# EAGLE board uflasherx (EAGLE 7.6.0)
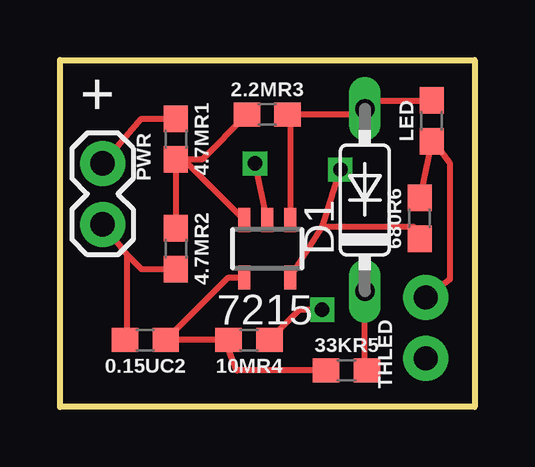
[diagram p0: board, top side]
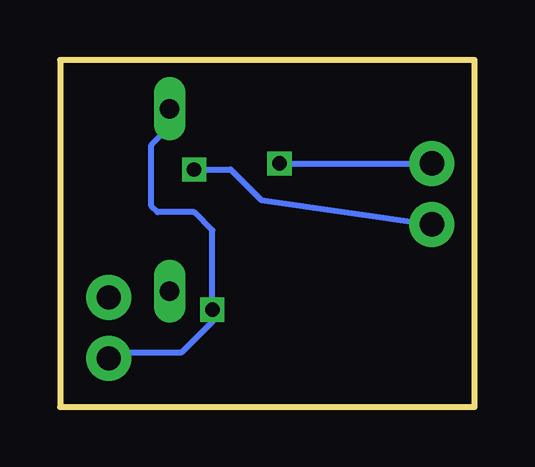
[diagram p1: board, bottom side, seen from below]

Size 17.27 x 14.48 mm. Coordinates in mm from the lower left corner, seen from the top.
Outline: 0,14.48 17.27,14.48 17.27,0 0,0 0,14.48
Copper layers (1*16): Top 0.035mm / dielectric 1.5mm / Bottom 0.035mm
Design rules "default": minimum track width 10mil, minimum drill 24mil, track to track 8mil, track to pad 8mil, pad to pad 8mil, via to via 8mil, smd to smd 8mil, copper to edge 40mil, drill to drill 8mil, minimum pad ring 10mil, minimum via ring 8mil, stop-mask expansion 4mil, vias tented up to drill 0mil, thermal gap 10mil

## Footprints (pad centres in the part's own frame; a part is rotated, then mirrored left to right if it is on the bottom)
0603 = smd 1.1 x 1: 1 -0.85,0; 2 0.85,0
SOT23-5 = smd 0.5 x 1: 1 -0.95,-1.2; 2 0,-1.2; 3 0.95,-1.2; 4 0.95,1.2; 5 -0.95,1.2
DO35-7 = drill 0.813 long: A 3.81,0; C -3.81,0
1X02 = drill 1.016 pad 1.88: 1 0,0; 2 2.54,0
1X02_NO_SILK = drill 1.016 pad 1.88: 1 0,0; 2 2.54,0

## Placement (x,y rotation side)
0.15UC2  [0603]  3.56,2.79 180 top
2.2MR3  [0603]  8.64,12.19 0 top
4.7MR1  [0603]  4.83,11.18 270 top
4.7MR2  [0603]  4.83,6.6 270 top
10MR4  [0603]  7.87,2.79 180 top
33KR5  [0603]  11.94,1.52 0 top
680R6  [0603]  14.99,7.87 90 top
7215  [SOT23-5]  8.64,6.6 180 top
D1  [DO35-7]  12.7,8.64 90 top
LED  [0603]  15.49,11.94 90 top
PWR  [1X02]  1.78,10.16 270 top
THLED  [1X02_NO_SILK]  15.24,2.03 90 top

## Library data of the parts
0.15UC2 = SparkFun-Capacitors
2.2MR3 4.7MR1 4.7MR2 10MR4 33KR5 680R6 LED = SparkFun-Resistors
7215 = zetex
D1 = diode
PWR THLED = SparkFun-Connectors

## Nets
3V: 4.7MR1.1 7215.2 PWR.1
DBOT: 33KR5.2 D1.C
FOUR: 0.15UC2.1 10MR4.2 33KR5.1 7215.4
GND: 0.15UC2.2 4.7MR2.2 680R6.1 7215.5 PWR.2
LEDBOT: 680R6.2 LED.1 THLED.2
ONE: 2.2MR3.2 10MR4.1 7215.1 D1.A LED.2 THLED.1
THREE: 2.2MR3.1 4.7MR1.2 4.7MR2.1 7215.3

## Tracks (layer width: path | path; a pad name or v marks a point on that pad's centre or on a via)
3V  (via drill 0.6)
  Top 0.254: PWR.1 3.39,12.03 4.7MR1.1 | 7215.2 v8.13,10.16
  Bottom 0.254: v8.13,10.16 PWR.1
DBOT
  Top 0.254: 33KR5.2 12.7,1.36 D1.C
FOUR
  Top 0.254: 7215.4 7.02,5.4 0.15UC2.1 10MR4.2 | 10MR4.2 7.11,2.71 | 33KR5.1 7.37,1.52 7.02,2.37 10MR4.2
GND  (via drill 0.6)
  Top 0.254: PWR.2 2.79,6.35 | 2.79,6.35 3.39,5.75 4.7MR2.2 | 7215.5 10.92,7.5 | 10.92,7.5 11,7.76 v11.68,9.91 | 0.15UC2.2 2.79,2.88 2.79,6.35 | 680R6.1 14.76,7.5 10.92,7.5
  Bottom 0.254: v11.68,9.91 10.16,9.91 8.89,8.64 PWR.2
LEDBOT
  Top 0.254: 680R6.2 LED.1 15.58,11.09 16.26,10.16 16.26,5.33 THLED.2
ONE  (via drill 0.6)
  Top 0.254: 7215.1 9.59,12.09 2.2MR3.2 12.45,12.19 D1.A 13.04,12.79 LED.2 | 10MR4.1 9.99,4.06 v10.92,4.06
  Bottom 0.254: D1.A 12.7,11.68 13.46,10.92 13.46,8.38 13.21,8.13 11.68,8.13 10.92,7.37 v10.92,4.06 10.92,3.56 12.19,2.29 14.99,2.29 THLED.1
THREE
  Top 0.254: 4.7MR1.2 4.7MR2.1 | 7215.3 5.16,10.33 4.7MR1.2 | 2.2MR3.1 5.92,10.33 4.7MR1.2

## Text on the board
tNames: +